# Altium PCB PCB2.PcbDoc
Units mm, origin at the board's own origin, x right, y up, seen from the top; angles counter-clockwise.
Board outline 75.56 x 79.76 mm, 2 copper layers (Top Layer, Bottom Layer); 27 components, 17 nets, 81 pads, 14 vias.
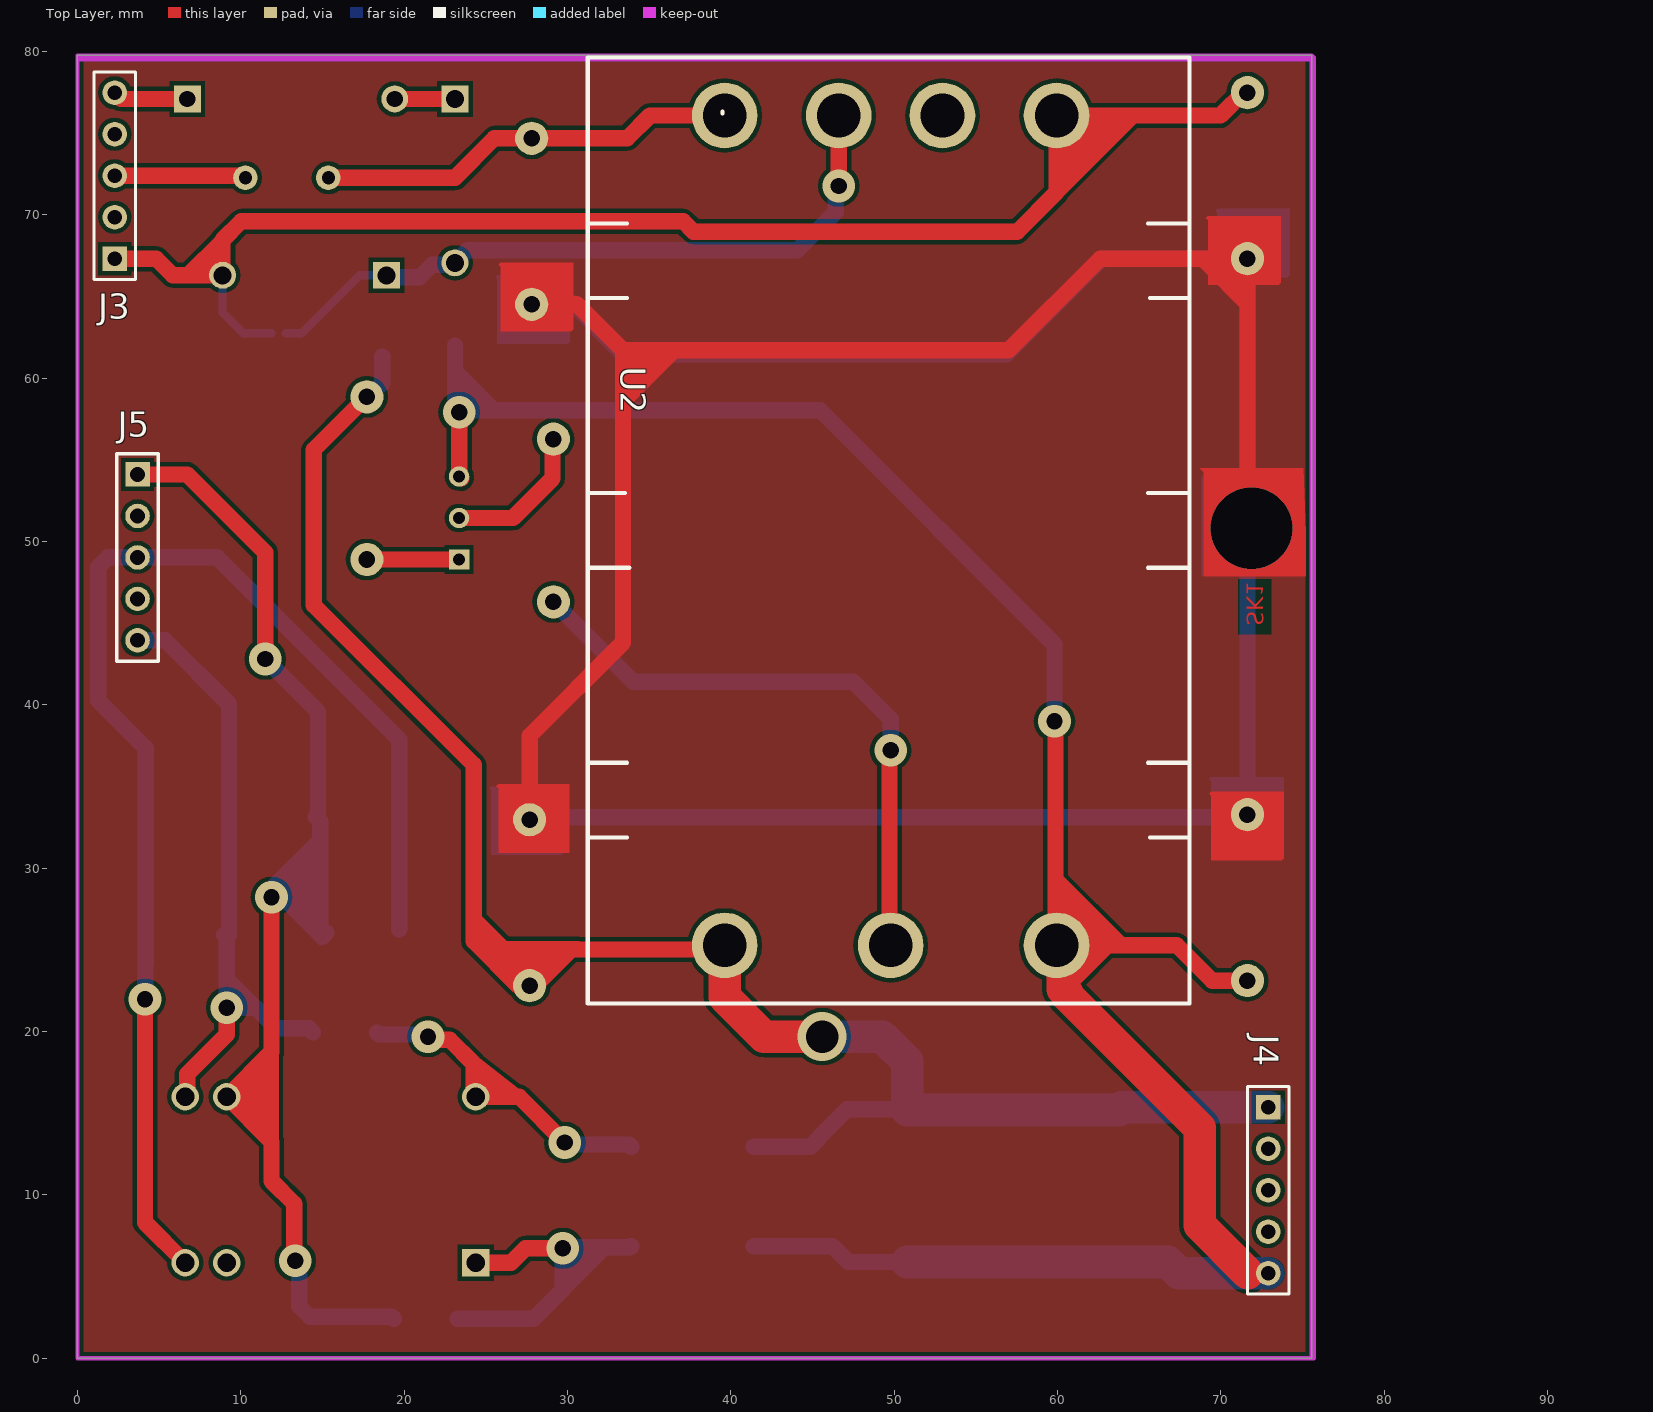
[diagram p0: Top Layer view]
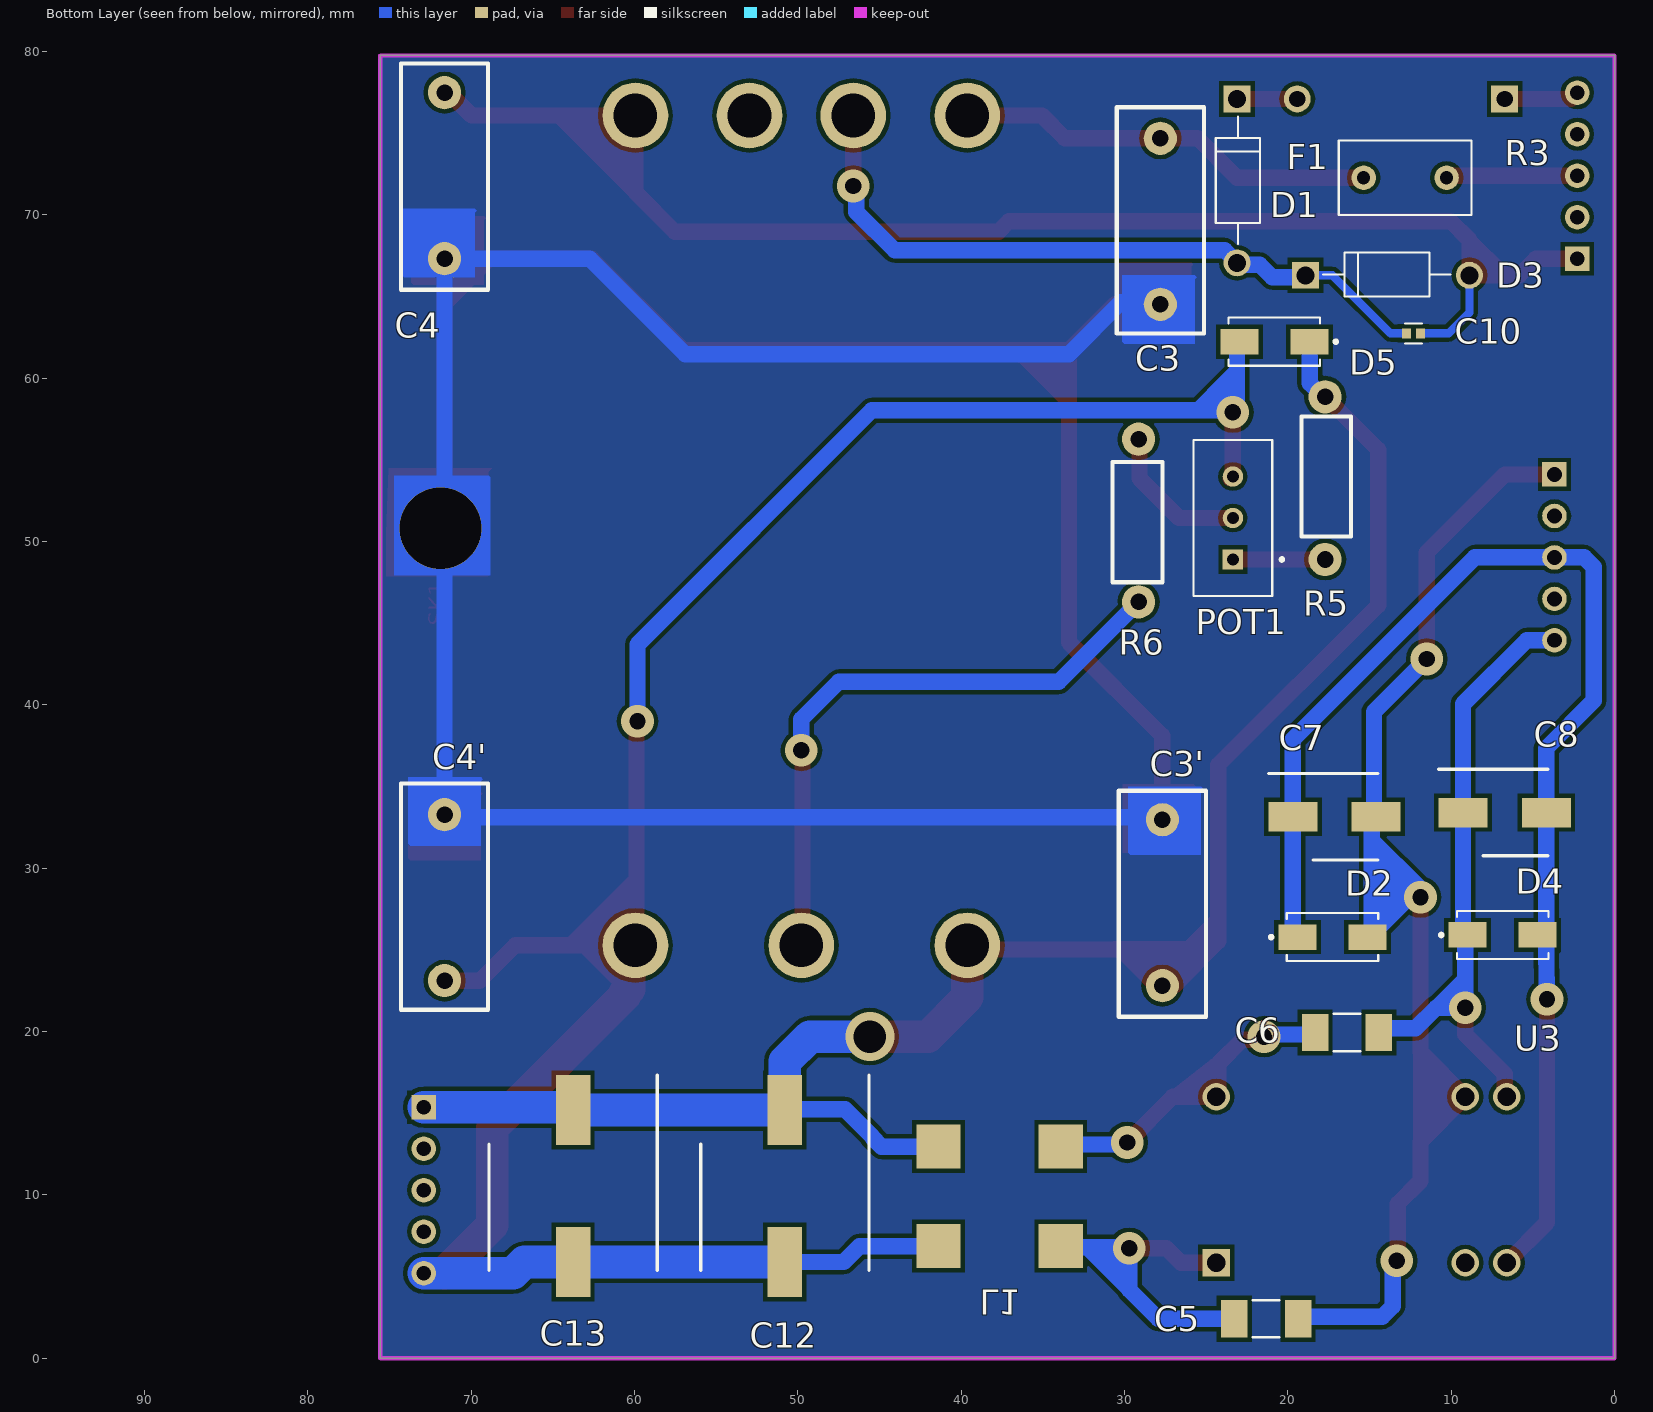
[diagram p1: Bottom Layer view, seen from below]
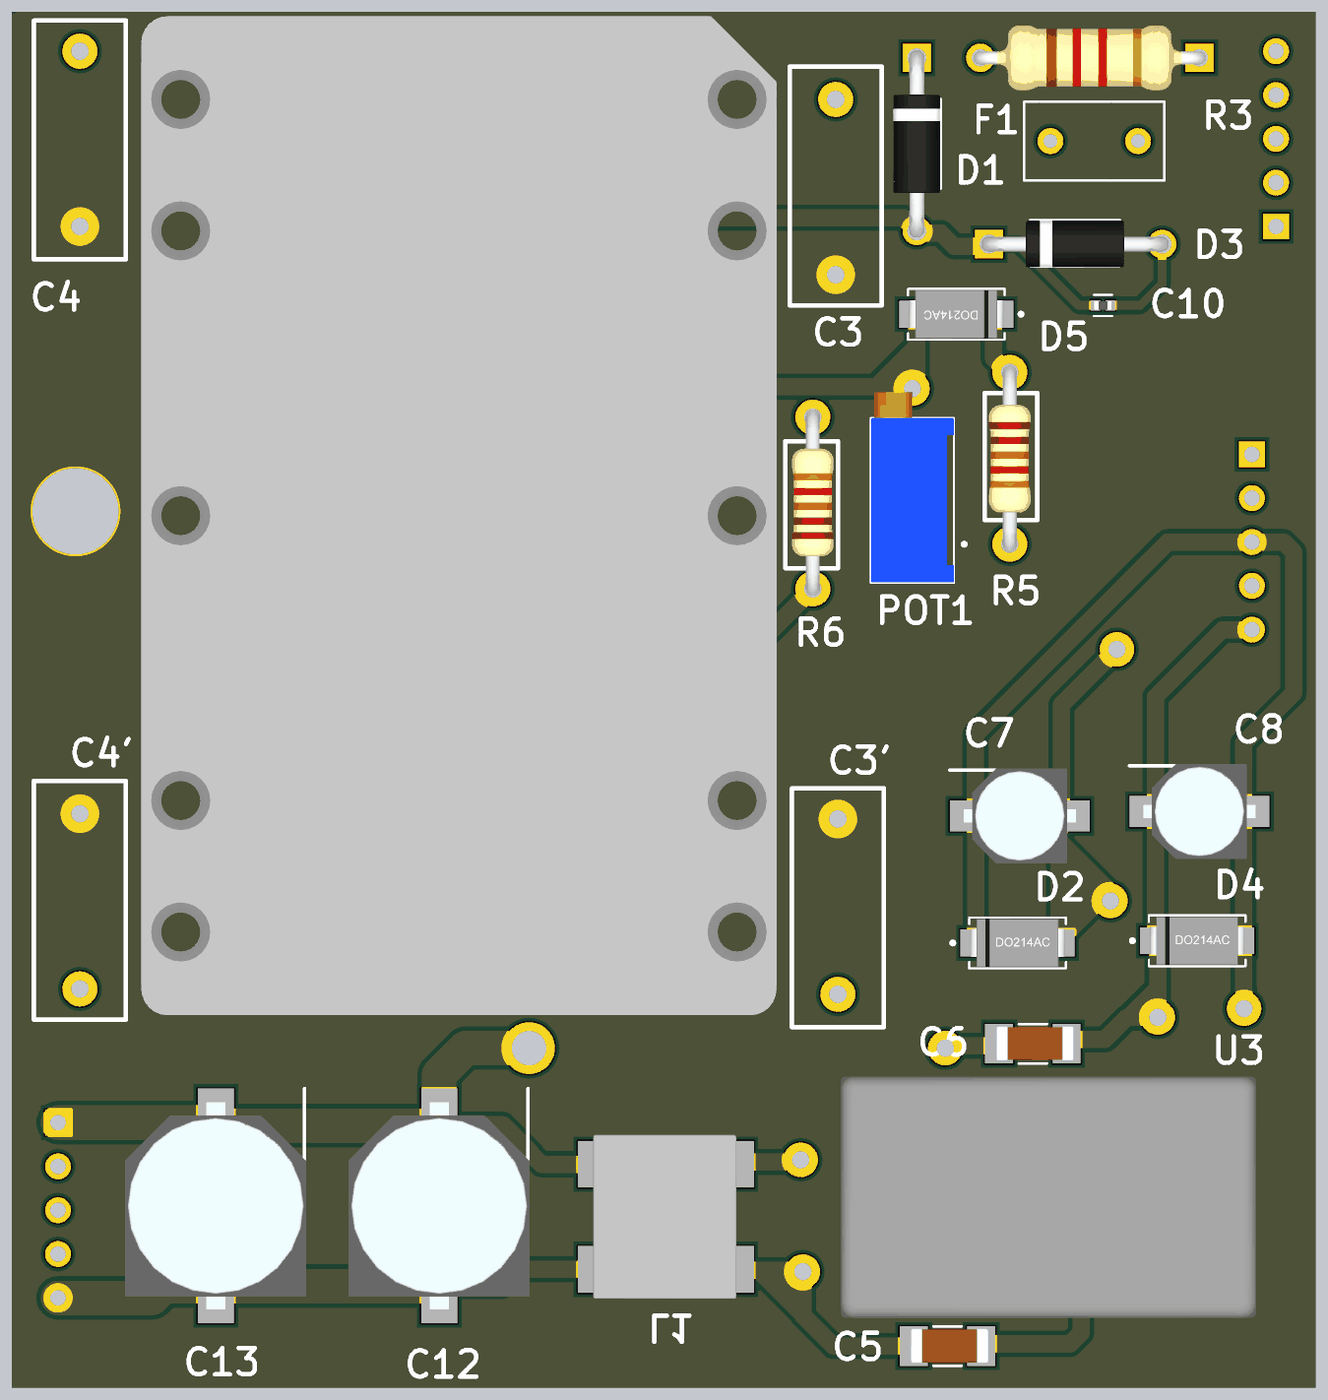
[diagram p2: 3D render of the assembled board from below, using the file's embedded part models]

## Layer stack, top to bottom
Top Solder: solder mask 0.0102, Solder Resist, Dk 3.5
Top Layer: signal copper 0.0356
Dielectric 1: dielectric 0.32, FR-4, Dk 4.8
Bottom Layer: signal copper 0.0356
Bottom Solder: solder mask 0.0102, Solder Resist, Dk 3.5

## Board outline
0,0 0,79.756 75.565,79.756 75.565,0

## Design rules (kind name [scope] priority, off if disabled: settings)
Clearance [All] p1: gap=0.254 ignorepadtopadclearanceinfootprint=TRUE
PolygonConnect [All] p1: connectstyle=Relief reliefconductorwidth=0.254 reliefentries=4 polygonreliefangle="90 Angle" airgapwidth=0.254
RoutingVias [All] p1: holewidth=0.711 width=1.27 viastyle="Through Hole" minholewidth=0.711 minwidth=1.27 maxholewidth=0.711 maxwidth=1.27
SolderMaskExpansion [All] p1: expansion=0.102
Width [All] p1: maxlimit=2 minlimit=0.5 preferedwidth=1 minimp=50.000000 maximp=50.000000 favimp=50.000000
30 further rules are at their usual default settings.

## Components (designator, comment, footprint, x,y, rotation, side; value= is the part's Value field where it differs from the comment)
C3 "01000" "Vicor 01000 Cap" 27.813,69.596 r90 bottom
C3' "01000" "Vicor 01000 Cap" 27.686,27.884 r270 bottom
C4 "01000" "Vicor 01000 Cap" 71.628,72.39 r270 bottom
C4' "01000" "Vicor 01000 Cap" 71.628,28.194 r90 bottom
C5 "1808GA101JAT1A" "MLCC SMD 1808 50V" 21.336,2.413 r180 bottom
C6 "1808GA101JAT1A" "MLCC SMD 1808 50V" 16.383,19.939 r180 bottom
C7 "EEE-FK1V100R" "PANASONIC FK SERIES" 17.145,33.147 r180 bottom
C8 "EEE-FK1V100R" "PANASONIC FK SERIES" 6.731,33.401 r180 bottom
C10 "UMF105B7102MVHF" "MLCC SMD 0402 50V" 12.319,62.738 r180 bottom
C12 "Panasonic electrolitic cap" "Panasonic TK series" 50.546,10.287 r270 bottom
C13 "Panasonic electrolitic cap" "Panasonic TK series" 63.5,10.287 r270 bottom
D1 "1N4006-E3/54" DO-41 23.114,71.755 r270 bottom
D2 "SMCJ15A" "TVS Diode DO-214AB-2 (SMC)" 17.272,25.781 r180 bottom
D3 "1N5817RLG" DO-41 13.589,66.294 r180 bottom
D4 "SMCJ15A" "TVS Diode DO-214AB-2 (SMC)" 6.858,25.908 r180 bottom
D5 "SMCJ15A" "TVS Diode DO-214AB-2 (SMC)" 20.828,62.23 r0 bottom
F1 "BK/PCB-3-R" "PCB-PCD Fuse Eaton" 10.287,72.263 r90 bottom
J3 "Header 5" HDR1X5 2.286,67.31 r90 top
J4 "Header 5" HDR1X5 72.898,15.367 r270 top
J5 "Header 5" HDR1X5 3.683,54.102 r270 top
L1 "744273222" 744273222 37.719,9.906 r180 bottom
POT1 "3296X-1-102LF" 3296W 23.368,51.435 r0 bottom
R3 "WHA250FET" "WHA Resistor" 6.731,77.089 r0 bottom
R5 "MF1/4DC1151F" "KOA MFS1/4 resistors" 17.653,53.848 r270 bottom
R6 "MF1/4DCT52R9311F" "KOA MF1/4 resistors" 29.21,51.308 r90 bottom
U2 "V300C15T150BL2" V300C**T***BL2 49.784,51.054 r0 top
U3 "TEL 10-2423WI" "TEL 10-2423WI" 24.384,16.002 r0 bottom

## Footprints (in the part's own frame and the unit in brackets; to place one, negate y for a bottom-side part, rotate by r counter-clockwise, add the part's x,y. Pads: shape width x height; smd on the part's side, far side on the other; paste and mask are expansions set on the pad)
3296W [mm] "Potenciometer"
  rect 1.248x1.248 hole 0.74: 1(0,2.54)
  round 1.248 hole 0.74: 2(0,0) 3(0,-2.54)
  silkscreen extent -3.1,-4.76 2.42,4.76, body extent -2.41,-6.28 2.39,4.75, height 10.03
744273222 [mm] "9.5mmx8.30mm"
  rect 2.7x2.7 smd: 1(-3.683,-3.048) 2(-3.683,3.048) 3(3.81,3.048) 4(3.81,-3.048)
  body extent -4.15,-4.75 4.15,8.89, height 5.9
DO-41 [mm]
  round 1.65 hole 1.1: A(4.699,0)
  rect 1.65x1.65 hole 1.1: C(-5.334,0)
  silkscreen extent -4.25,-1.3 3.55,1.4, body extent -5.78,-1.36 5.08,1.36, height 4.36
HDR1X5 [mm] "Connector; Header; 5 Position"
  rect 1.5x1.5 hole 0.9: 1(0,0)
  round 1.5 hole 0.9: 2(2.54,0) 3(5.08,0) 4(7.62,0) 5(10.16,0)
  silkscreen extent -1.27,-1.27 11.43,1.27
"KOA MF1/4 resistors" [mil]
  round 80 hole 40: 1(-197.05,-2.76) 2(195,-2.76)
  silkscreen extent -150,-60 140,60, body extent -213,-50 213,44, height 102
"KOA MFS1/4 resistors" [mil]
  round 80 hole 40: 1(-197.05,-2.76) 2(195,-2.76)
  silkscreen extent -150,-60 140,60, body extent -213,-50 213,44, height 102
"MLCC SMD 0402 50V" [mm]
  rect 0.54x0.6 smd: 1(-0.43,0) 2(0.43,0)
  silkscreen extent -0.52,-0.61 0.52,0.61, body extent -0.5,-0.25 0.5,0.25, height 0.4
"MLCC SMD 1808 50V" [mil]
  rect 64x90 smd: 1(-77,0) 2(77,0)
  silkscreen extent -32,-45 32,45, body extent -84,-39 94,40, height 79
"PANASONIC FK SERIES" [mm]
  rect 3x1.8 smd: 1(-2.55,0) 2(2.55,0)
  silkscreen extent -4.05,-2.65 2.65,2.65, body extent -3.25,-2.75 3.25,2.75, height 6.1
"Panasonic TK series" [mm]
  rect 4.3x2.1 smd: 1(-4.904,-0.254) 2(4.396,-0.254)
  silkscreen extent -7.05,-5.4 4.9,4.9, body extent -6.25,-5.5 5.75,5, height 10.5
"PCB-PCD Fuse Eaton" [mm]
  round 1.5 hole 0.8: 1(0,0) 2(0,5.08)
  silkscreen extent -2.29,-1.52 2.29,6.6, body extent -2.41,-1.91 2.41,6.98, height 8.13
"TEL 10-2423WI" [mil] "23.8x13.7mm"
  rect 66x66 hole 44: 1(0,400)
  round 66 hole 44: 7(-600,400) 8(-700,400) 9(-700,0) 10(-600,0) 16(0,0)
  body extent -825,-81 124,471, height 134
"TVS Diode DO-214AB-2 (SMC)" [mm]
  rect 2.33x1.56 smd: A(2.14,0) C(-2.14,0)
  silkscreen extent -3.85,-1.47 2.8,1.47, body extent -2.74,-1.4 2.74,1.4, height 2.34
V300C**T***BL2 [mm]
  round 4.02 hole 2.67: 1(-10.16,25.019) 2(-3.175,25.019) 3(3.175,25.019) 4(10.16,25.019) 5(10.16,-25.781) 6(0,-25.781) 7(-10.16,-25.781)
  round 4.93 on Top Overlay: ""(-16.13,-16.891) ""(-16.13,-0.381) ""(-16.13,16.129) ""(15.748,-16.891) ""(15.748,-0.381) ""(15.748,16.129)
  silkscreen extent -18.54,-29.34 18.29,28.57, body extent -18.54,-29.46 18.29,28.45, height 3.54
"Vicor 01000 Cap" [mil] "Cap Film 250Vac 4700pF"
  round 80 hole 40: 1(-200,0) 2(200,0)
  silkscreen extent -270,-105 275,105, body extent -265,-100 270,100, height 413
"WHA Resistor" [mm] "5.08Lx2.54D, 0.6d"
  rect 1.65x1.65 hole 1: 1(0,0)
  round 1.65 hole 1: 2(12.7,0)
  body extent -0.37,-1.88 13.08,1.87, height 4.38

## Part data
C3 C3' C4 C4': library part "Vicor 01000", "Cap Film 250Vac 4700pF", ComponentLink1Description=01000, ComponentLink1URL=https://www.mouser.es/ProductDetail/Vicor/01000?qs=sGAEpiMZZMuWWq7rhECaKfvknpKVOrJMQIoHOM%252Blhgk%3D
C5 C6: library part "MLCC - SMD 1808", "2KV 100pF C0G 1808 5%", ComponentLink1Description=1808GA101JAT1A, ComponentLink1URL=https://www.mouser.es/ProductDetail/AVX/1808GA101JAT1A?qs=uXoVb1bFidQW%252BmL544imEA==
C7 C8: library part "Panasonic electrolitic cap FK", "10uF, 35V", ComponentLink1Description=EEE-FK1V100R, ComponentLink1URL=https://www.mouser.es/ProductDetail/Panasonic/EEE-FK1V100R?qs=%2Fha2pyFaduj%2FIt2M0EHCFH6KCxiBIGyUhvn03lKjROYI3CJTVtBsWg%3D%3D
C10: library part "MLCC- SMD/SMT", "0402 50V 1000pF 20%", ComponentLink1Description=UMF105B7102MVHF, ComponentLink1URL=https://www.mouser.es/ProductDetail/Taiyo-Yuden/UMF105B7102MVHF?qs=sGAEpiMZZMsh%252B1woXyUXj3%2F0vCYPokIksdT%252B3UPAP3Y%3D
C12 C13: "100uF, 35Vdc", ComponentLink1Description=EEE-TK1V101P, ComponentLink1URL=https://www.mouser.es/ProductDetail/Panasonic/EEE-TK1V101P?qs=sGAEpiMZZMtZ1n0r9vR22cS6GEbW2ftohEDRFgYA5M4%3D
D1: library part "Diodo Standard", "Rectificadores Vr/800V Io/1A", ComponentLink1Description=1N4006-E3/54, ComponentLink1URL=https://www.mouser.es/ProductDetail/Vishay-Semiconductors/1N4006-E3-54?qs=N4vtoAxH%2FSrsleYv417wqA%3D%3D
D2 D4 D5: library part "TVS SMCJxxA", "SMC do-214AB-2", ComponentLink1Description=SMCJ15A, ComponentLink1URL=https://www.mouser.es/ProductDetail/Taiwan-Semiconductor/SMCJ15A?qs=sGAEpiMZZMvxHShE6Whpu8fatLI1nnJdRhHnBKQQd%2F4%3D
D3: library part "Diodo Standard", "Diodos y rectificadores Schottky 1A 20V", ComponentLink1Description=1N5817RLG, ComponentLink1URL=https://www.mouser.es/ProductDetail/ON-Semiconductor/1N5817RLG?qs=sGAEpiMZZMtQ8nqTKtFS%2FCKUxMvjsmGzOxc2t8Io3Tc%3D
F1: library part "PCB-PCD  Fuse", "3A, 250VAC", ComponentLink1Description=BK/PCB-3-R, ComponentLink1URL=https://www.mouser.es/ProductDetail/Bussmann-Eaton/BK-PCB-3-R?qs=sGAEpiMZZMsNIlwy3aAdUaDZNJYRjnIOAIrCwmRP80U%3D
J3 J4 J5: "Header, 5-Pin", LatestRevisionDate=17-Jul-2002, LatestRevisionNote="Re-released for DXP Platform.", Publisher="Altium Limited"
L1: "CMC 30UH 1.4A 2LN 2.2 KOHM SMD", ComponentLink1Description=Datasheet, ComponentLink1URL=https://www.we-online.de/katalog/datasheet/744273222.pdf, ComponentLink2Description=744273222, ComponentLink2URL=https://www.digikey.com/product-detail/en/w%C3%BCrth-elektronik/744273222/732-2961-2-ND/2625900
POT1: library part 3296W, "1kOhm", ComponentLink1Description=3296W, ComponentLink1URL=https://www.mouser.es/ProductDetail/Bourns/3296X-1-102LF?qs=sGAEpiMZZMvygUB3GLcD7sSg8po3Zpo39j0IRAy8iUQ%3D
R3: library part "Resistor bobinado", "0.5W 250 ohms 1%", ComponentLink1Description=WHA250FET, ComponentLink1URL=https://www.mouser.es/ProductDetail/Ohmite/WHA250FET?qs=sGAEpiMZZMtlubZbdhIBICsIiTQa2nvcChJCFP%2FmfdI%3D
R5: library part "KOA MFS1/4 resistors", "1,15kOhm", ComponentLink1Description=MF1/4DC1151F, ComponentLink1URL=https://www.mouser.es/ProductDetail/KOA-Speer/MF1-4DC1151F?qs=sGAEpiMZZMu61qfTUdNhG7WeLdaRvH9A9PYBQZY3Jro%3D
R6: library part "KOA MF1/4 resistors", "9.28kOhm", ComponentLink1Description=MF1/4DCT52R9311F, ComponentLink1URL=https://www.mouser.es/ProductDetail/KOA-Speer/MF1-4DCT52R9311F?qs=sGAEpiMZZMu61qfTUdNhG%2FDQawzJ6c7PvJQ3koAyQBI%3D
U2: library part V300C**T***BL2, "DC/DC converter Micro Family", ComponentLink1Description=Vicor, ComponentLink1URL=http://www.vicorpower.com/dc-dc-converters-board-mount/high-density-dc-dc-converters, ComponentLink2Description=V300C15T150BL2, ComponentLink2URL=https://www.mouser.es/ProductDetail/Vicor/V300C15T150BL2?qs=%2Fha2pyFaduiLhIankBTTmZKrPSIILbrL8nAz3AoioOOMymv1LXbubw%3D%3D
U3: library part "TEL 10WI Series", "TEL 10WI series is a range of isolated 10 Watt converters which come in / an ultra compact DIP-16", ComponentLink1Description="TEL 10WI Series", ComponentLink1URL=https://www.tracopower.com/sites/default/files/products/datasheets/tel10wi_datasheet.pdf, ComponentLink2Description="TEL 10-2423WI", ComponentLink2URL=https://www.mouser.es/ProductDetail/TRACO-Power/TEL-10-2423WI?qs=y6ZabgHbY%252Bwg%252BI3%252Bdy9OqQ%3D%3D

## Via types
v1: diameter 2, hole 1, Top Layer to Bottom Layer, 12 vias
v2: diameter 5, hole 5, Top Layer to Bottom Layer, 1 vias
v3: diameter 3, hole 2, Top Layer to Bottom Layer, 1 vias

## Nets (pads, with @x,y where several pads share a name; then routed paths per layer and width w, separated by ;. In a path a pad name is that pad's centre, name@x,y a point inside that pad or via, vN(x,y) a via of type N, cw(c..) or ccw(c..) an arc to the next point about the centre after c; other vN are vias at no path point)
NetC3'_2: C3'.2 C12.1 C13.1 D5.C J4.1 L1.2 R5.1 U2.7 | length 110.7
  Top Layer w1: R5.1 14.478,55.608 14.478,46.101 24.257,36.322 24.257,25.527 26.98,22.804 C3'.2 28.011,22.804 30.226,25.019 39.37,25.019 U2.7
  Top Layer w2: U2.7 39.624,22.098 42.037,19.685 v3(45.593,19.685)
  Bottom Layer w1: R5.1 17.832,58.853 18.669,59.69 18.669,61.322 ; L1.2 44.88,12.954 45.466,13.54 45.466,13.589 47.117,15.24 50.751,15.24 C12.1 ; C13.1 C13.1@63.93,15.367
  Bottom Layer w2: v3(45.593,19.685) 49.276,19.685 50.8,18.161 C12.1 C13.1 ; C13.1@63.93,15.367 J4.1
NetC3_2: C3.2 F1.2 U2.1 | length 25.8
  Top Layer w1: F1.2 23.114,72.263 25.527,74.676 C3.2 33.655,74.676 35.052,76.073 U2.1
NetC4'_1: C4'.1 C12.2 C13.2 D5.A J4.5 L1.1 POT1.3 U2.5 | length 140.1
  Top Layer w1: v1(23.368,57.912) POT1.3 POT1.3@23.495,53.848 ; v1(59.817,38.989) 59.88,38.925 59.88,25.336 U2.5 67.31,25.273 69.469,23.114 C4'.1 ; 71.653,5.207 J4.5
  Top Layer w2: U2.5 60.331,24.886 60.331,22.6 60.579,22.352 60.579,22.225 68.707,14.097 68.707,8.153 71.653,5.207
  Bottom Layer w1: D5.A@23.114,61.995 23.114,58.166 v1(23.368,57.912) 23.487,58.031 45.474,58.031 59.817,43.688 v1(59.817,38.989) ; L1.1 46.228,6.858 47.195,5.891 C12.2
  Bottom Layer w2: C12.2 C13.2 66.753,5.891 67.437,5.207 J4.5
NetC4_1: C4.1 C10.2 D3.A J3.1 U2.4 | length 84.7
  Top Layer w1: J3.1 4.826,67.31 5.842,66.294 D3.A 8.89,68.453 10.033,69.596 37.084,69.596 37.719,68.961 57.531,68.961 59.944,71.374 U2.4 69.977,76.073 C4.1@71.501,77.597
  Bottom Layer w0.508: D3.A 8.89,64.008 10.16,62.738 C10.2
NetC5_1: C5.1 L1.4 U3.1 | length 19.6
  Top Layer w1: U3.1 26.543,5.842 27.432,6.731 v1(29.718,6.731)
  Bottom Layer w1: C5.1 27.94,2.413 29.718,4.191 v1(29.718,6.731) 29.781,6.794 33.846,6.794 L1.4
NetC5_2: C5.2 C7.2 D2.A J5.1 U3.10 | length 69.6
  Top Layer w1: J5.1 6.726,54.102 11.506,49.322 v1(11.506,42.799) ; v1(11.887,28.219) 11.887,18.745 U3.10 11.887,13.259 11.887,10.846 13.278,9.455 v1@13.278,5.969
  Bottom Layer w1: v1(11.506,42.799) 14.732,39.573 14.732,33.284 C7.2 14.863,32.878 14.863,25.904 14.986,25.781 D2.A@15.24,26.035 ; v1(11.887,28.219) v1@12.09,28.219 ; v1(13.335,5.969) 13.335,5.698 13.589,5.444 13.589,3.175 14.224,2.54 19.253,2.54 C5.2
NetC6_1: C6.1 L1.3 U3.16 | length 19.6
  Top Layer w1: v1(21.463,19.685) 21.654,19.494 22.797,19.494 24.255,18.036 24.255,16.131 U3.16 27.051,16.002 v1(29.845,13.208)
  Bottom Layer w1: C6.1 18.466,19.812 21.336,19.812 v1(21.463,19.685) ; v1(29.845,13.208) 29.972,13.081 33.782,13.081 L1.3
NetC6_2: C6.2 C8.1 D4.C J5.5 U3.9 | length 38.3
  Top Layer w1: U3.9 6.733,16.131 6.733,17.401 9.144,19.812 v1(9.144,21.463)
  Bottom Layer w1: J5.5 5.385,43.942 9.281,40.046 C8.1 D4.C@9.281,25.908 ; D4.C 9.144,25.762 v1(9.144,21.463) 10.922,21.463 12.192,20.193 14.173,20.193 C6.2
NetC7_1: C7.1 C8.2 D2.C D4.A J5.3 U3.8 | length 80.5
  Top Layer w1: v1(4.14,21.971) 4.14,8.306 U3.8
  Bottom Layer w1: v1(4.14,21.971) 4.18,24.765 4.181,24.827 ; 4.181,24.765 4.181,24.827 ; D4.A@4.191,25.527 4.181,24.827 ; D2.C@19.695,26.26 C7.1 19.71,33.147 19.71,37.875 8.564,49.022 J5.3 1.856,49.022 1.27,48.436 1.27,40.259 4.181,37.348 C8.2 4.181,24.827
NetC10_1: C10.1 D1.A D3.C U2.2 | length 43.2
  Top Layer w1: D3.C D3.C@19.05,66.167 ; D1.A@22.99,66.932 D1.A ; v1(46.609,71.755) U2.2
  Bottom Layer w0.508: C10.1 13.716,62.738 17.272,66.294 D3.C
  Bottom Layer w1: D3.C 19.05,66.167 20.955,66.167 21.72,66.932 22.99,66.932 D1.A 23.876,67.818 44.069,67.818 46.418,70.167 46.418,71.564 v1(46.609,71.755)
NetD1_C: D1.C R3.2 | length 3.7
  Top Layer w1: R3.2 D1.C
NetF1_1: F1.1 J3.3 | length 7.7
  Top Layer w1: J3.3 F1.1@10.033,72.39
NetJ3_5: J3.5 R3.1 | length 4.6
  Top Layer w1: J3.5 2.667,77.089 R3.1
NetPOT1_1: POT1.1 R5.2 | length 5.6
  Top Layer w1: R5.2 POT1.1
NetPOT1_2: POT1.2 R6.2 | length 9.1
  Top Layer w1: POT1.2 26.67,51.435 29.083,53.848 R6.2@29.083,56.261
NetR6_1: R6.1 U2.6 | length 37.5
  Top Layer w1: U2.6 49.721,25.336 49.721,37.148 v1(49.784,37.211)
  Bottom Layer w1: R6.1@29.137,46.301 34.036,41.402 47.498,41.402 49.784,39.116 v1(49.784,37.211)
PE: C3'.1 C3.1 C4'.2 C4.2 | length 219.9
  Top Layer w1: C3'.1@27.686,33.655 27.686,38.1 33.401,43.815 33.401,61.696 ; C3.1 30.581,64.516 33.401,61.696 ; v2@71.628,50.8 C4.2 62.611,67.31 56.997,61.696 33.401,61.696
  Bottom Layer w1: C3'.1 27.841,33.119 71.473,33.119 C4'.2 C4.2 62.738,67.31 56.896,61.468 33.401,61.468 30.226,64.643 27.94,64.643 C3.1
  other v2: 71.882,50.8
pads on no net: J3.2 J3.4 J4.2 J4.3 J4.4 J5.2 J5.4 U2. U2.3 U3.7

## Polygon pours and split planes (outlines as drawn)
PE on Bottom Layer "Bottom Layer-PE" (solid, pour order 0): 75.438,79.629 75.311,79.756 0,79.756 0,0 75.692,0 75.692,79.502 75.438,79.756
PE on Top Layer (solid, pour order 4): 75.565,0 75.565,79.756 0.127,79.756 0,79.629 0,0

## Keep-outs
Top Layer:
  lines w0.254: 0,0 75.692,0 ; 0,0 0,79.502 75.692,79.502 75.692,0 ; 0,0 75.692,0 ; 0,0 0,79.756 75.565,79.756 75.692,79.629 75.692,0
Keep-Out Layer:
  the board outline again, w0.254

## Other copper
Top Layer:
  region net NetC4_1: 7.874,67.31
  region net NetC4_1: 7.747,67.437
  region net NetC4_1: 7.874,67.056
  region: 7.493,67.945
  region net NetC4_1: 8.89,66.294 8.89,69.088 6.096,66.294
  region net NetC3'_2: 26.416,25.4 24.257,27.559 24.257,25.527 24.384,25.4
  region net PE: 75.057,54.483 68.707,54.483 68.961,54.229 68.961,47.879 75.184,47.879 75.184,50.546
  region net PE: 30.353,67.056 25.891,67.056 25.781,66.946 25.908,66.819 25.908,62.865 30.226,62.865 30.353,62.992
  region net PE: 73.66,69.905 69.198,69.905 69.088,69.795 69.215,69.668 69.215,65.714 73.533,65.714 73.66,65.841
  region net PE: 73.863,34.671 69.401,34.671 69.291,34.561 69.418,34.434 69.418,30.48 73.736,30.48 73.863,30.607
  region net PE: 30.099,35.123 25.764,35.123 25.654,35.013 25.781,34.886 25.781,30.932 30.099,30.932
  region: 94.107,29.337
  region net NetC4'_1: 60.331,22.86 61.341,22.86 64.008,25.527 60.452,29.083 60.071,29.083
  region net NetC4'_1: 59.944,25.273 59.944,29.909 64.389,25.463 64.389,25.273
  region net NetC3'_2: 27.341,22.804 24.618,25.527 30.734,25.527 28.011,22.804
  region net NetC6_1: 24.654,18.319 24.384,18.049 24.384,16.002 27.63,16.002
  region net NetC5_2: 9.144,16.002 12.319,12.827 12.319,19.177
  region net PE: 71.628,67.31 71.628,63.881 68.453,67.056 68.453,67.31
  region net PE: 33.401,57.912 33.427,57.912 37.211,61.696 33.401,61.696
  region net NetC4_1: 59.944,76.073 59.944,70.739 65.278,76.073
  text "SK1" at 71.577,44.831 h1 r270
Bottom Layer:
  region net PE: 74.7,54.018 68.921,54.018 68.834,53.932 68.834,47.922 74.7,47.922
  region net PE: 30.157,66.294 25.696,66.294 25.585,66.184 25.712,66.057 25.712,62.103 30.03,62.103 30.157,62.23
  region net PE: 29.782,34.996 25.32,34.996 25.21,34.886 25.337,34.759 25.337,30.805 29.655,30.805 29.782,30.932
  region net PE: 73.851,35.56 69.389,35.56 69.279,35.45 69.406,35.323 69.406,31.369 73.724,31.369 73.851,31.496
  region net PE: 74.232,70.358 69.77,70.358 69.66,70.248 69.787,70.121 69.787,66.167 74.105,66.167 74.232,66.294
  region net NetC5_2: 11.29,28.816 14.859,25.248 14.859,32.385
  region net NetC6_2: 9.144,21.463 9.144,23.876 11.557,21.463
  region net NetC5_1: 29.781,6.794 29.781,3.619 33.036,6.874
  region net NetC4'_1: 23.349,60.833 23.368,60.833 26.543,57.658 23.241,57.658
  region net NetF1_1: 4.445,74.169
  region net PE: 68.199,36.577
  region: 64.262,9.907
  region net NetC4'_1: 56.388,1.545

## Silkscreen, mask and mechanical layers (free items; w line width, h text height)
Mechanical 4:
  lines w0.254: 0,61.214 6.223,61.214 10.033,61.214 13.843,57.404 13.843,45.974 16.51,43.307 23.749,36.068 23.749,21.463 24.384,20.828 75.565,20.828 75.692,20.955